# Altium PCB PCB1.PcbDoc (part 1 of 2)
Units mil, origin at the board's own origin, x right, y up, seen from the top; angles counter-clockwise.
Board outline 5020 x 3185 mil, 4 copper layers (Top Layer, GND, VCC, Bottom Layer), stack 23.756 mil thick; 166 components, 117 nets, 551 pads, 495 vias.
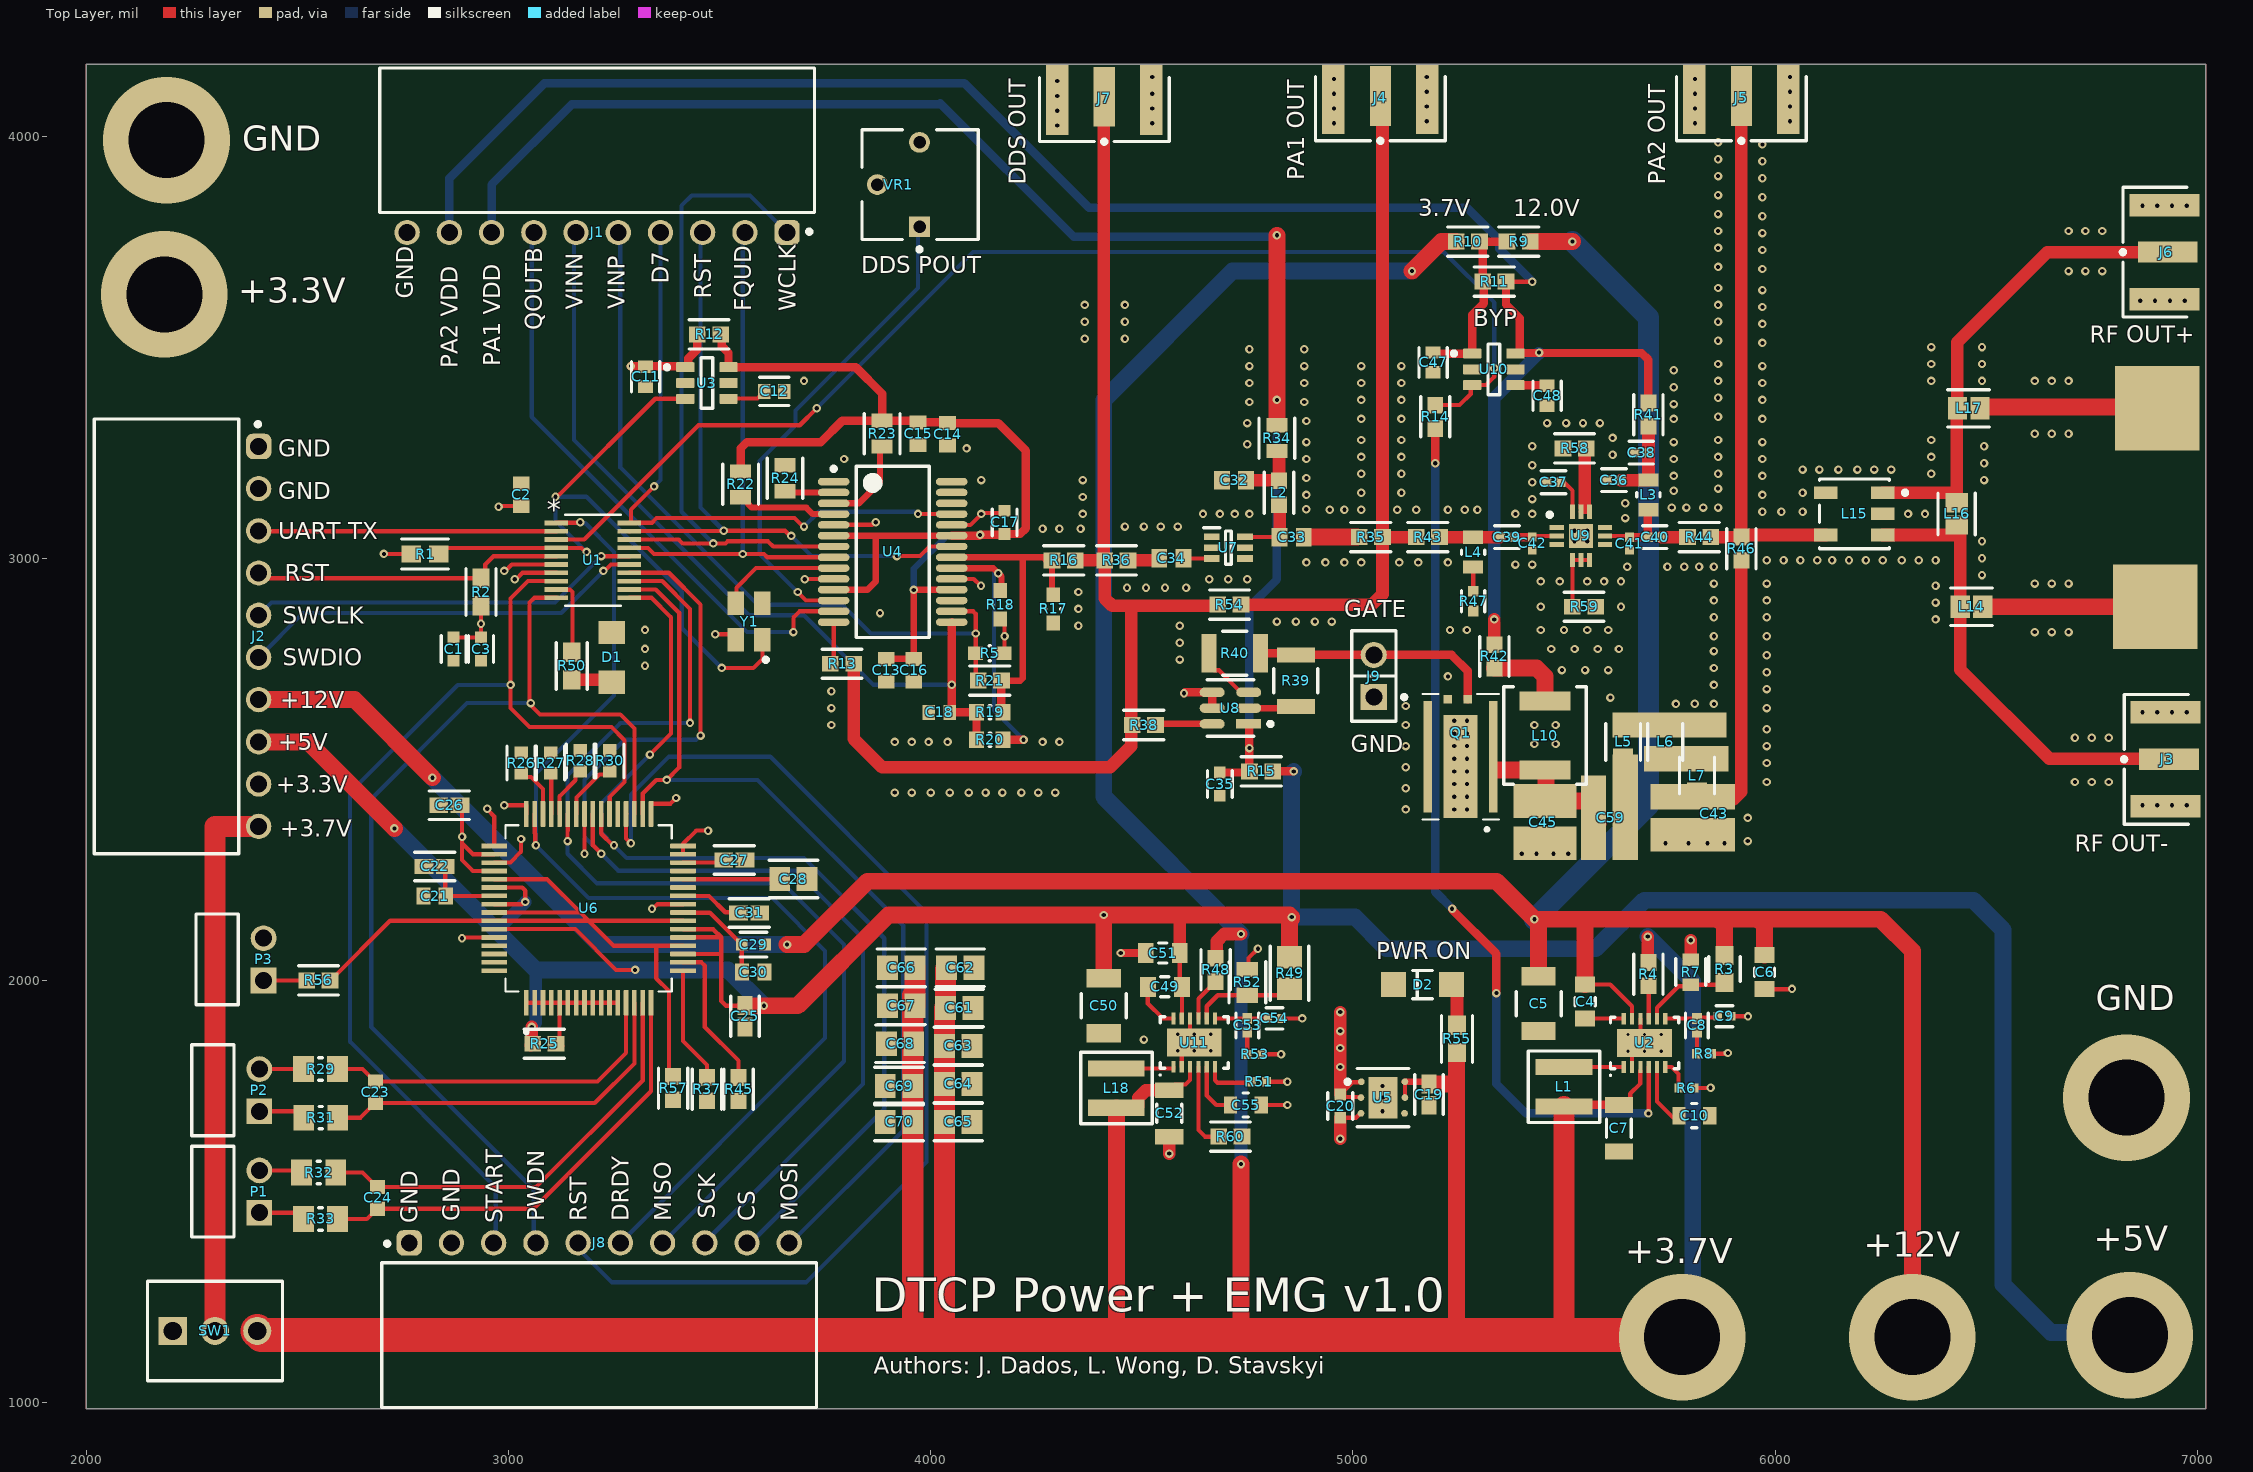
[diagram p0: Top Layer view]
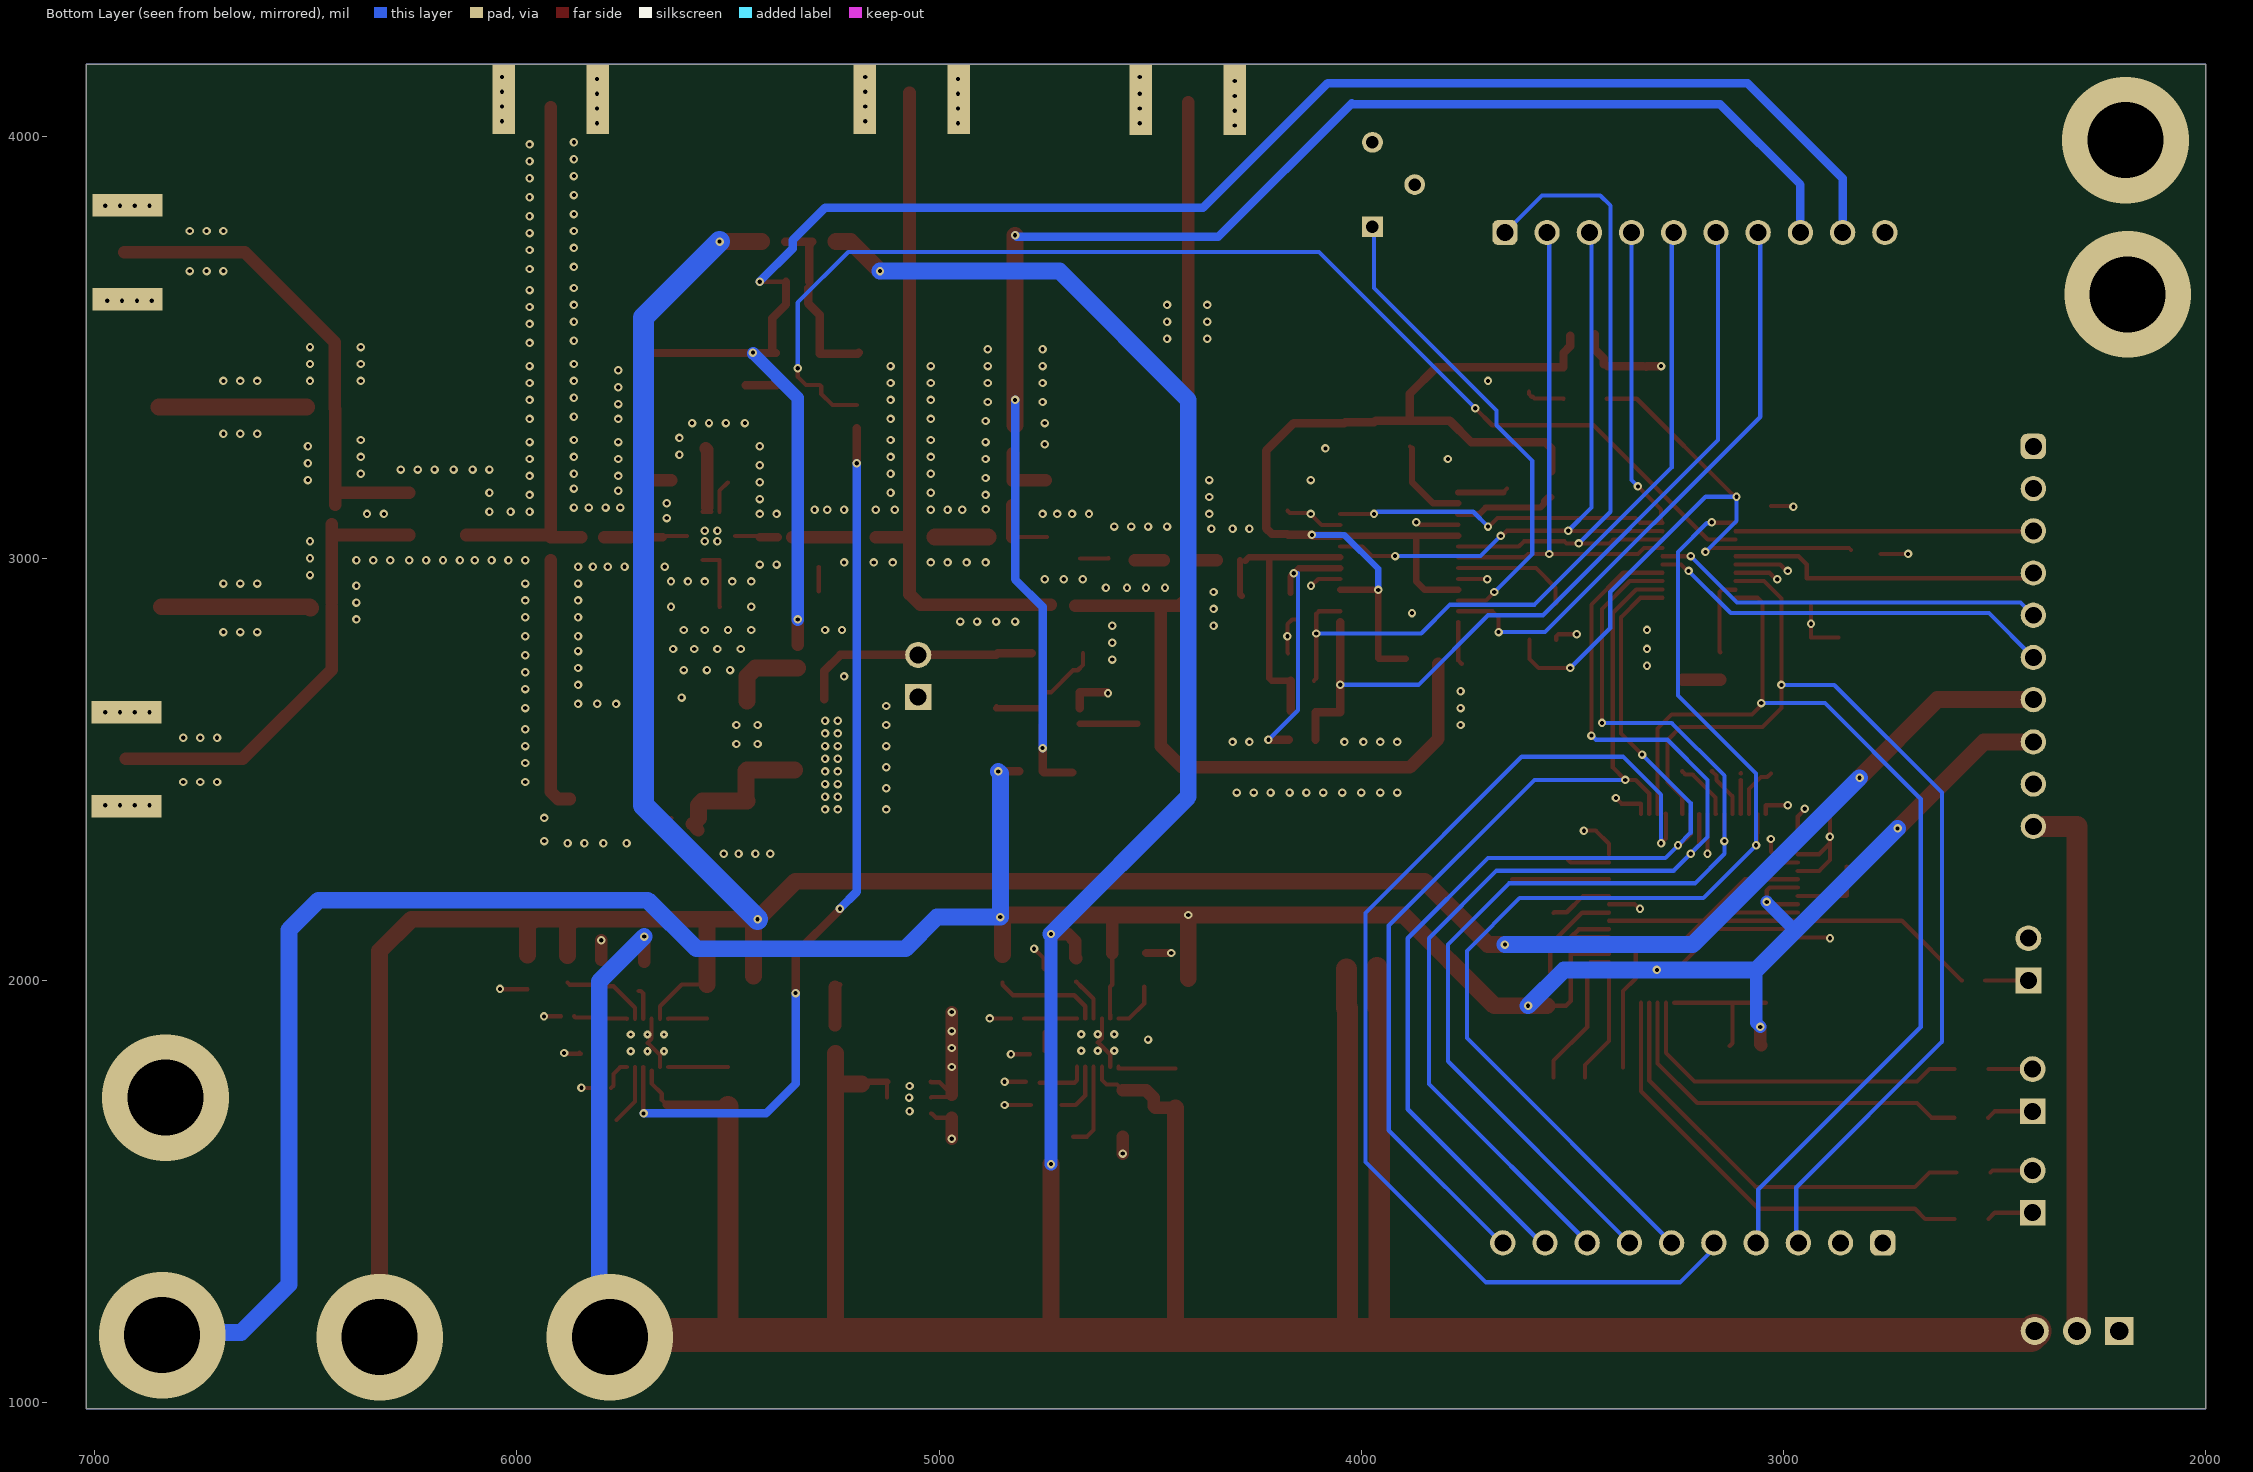
[diagram p1: Bottom Layer view, seen from below]

## Layer stack, top to bottom
Top Solder: solder mask 0.4, Solder Resist, Dk 3.5
Top Layer: signal copper 1.4
Dielectric 2: prepreg 2.8, PP-006, Dk 4.1
GND: signal copper 1.378
Dielectric 1: dielectric 12.6, FR-4, Dk 4.8
VCC: signal copper 1.378
Dielectric 3: prepreg 2.8, PP-006, Dk 4.1
Bottom Layer: signal copper 1.4
Bottom Solder: solder mask 0.4, Solder Resist, Dk 3.5

## Board outline
2000,985 2000,4170 7020,4170 7020,985

## Design rules (kind name [scope] priority, off if disabled: settings)
AssemblyTestPointUsage [All] p0: scope1count=1 scope1_0_kind=Board scope1_0_value=Board scope2count=1 scope2_0_kind=Board scope2_0_value=Board commentlength=0
AssemblyTestpoint [All] p0: scope1count=1 scope1_0_kind=Board scope1_0_value=Board scope2count=1 scope2_0_kind=Board scope2_0_value=Board commentlength=0
Clearance [All] p0: scope1count=1 scope1_0_kind=Board scope1_0_value=Board scope2count=1 scope2_0_kind=Board scope2_0_value=Board commentlength=0 gap=10
Clearance [All] p1: gap=10 ignorepadtopadclearanceinfootprint=FALSE except(0: Arc-Hole Track-Hole SMDPad-Hole THPad-Hole Via-Hole Fill-Hole Poly-Hole Region-Hole Text-Hole; 2: SMDPad-SMDPad; 5: Arc-Arc Arc-Track Arc-SMDPad Track-Track Track-SMDPad; 20: Arc-Fill Arc-Poly Arc-Region Track-Fill Track-Poly Track-Region Fill-Fill Fill-Poly Fill-Region Poly-Poly Poly-Region Region-Region)
ComponentClearance [All] p0: scope1count=1 scope1_0_kind=Board scope1_0_value=Board scope2count=1 scope2_0_kind=Board scope2_0_value=Board commentlength=0 gap=10 collisioncheckmode=3
DiffPairsRouting [All] p0: scope1count=1 scope1_0_kind=Board scope1_0_value=Board scope2count=1 scope2_0_kind=Board scope2_0_value=Board commentlength=0
FabricationTestPointUsage [All] p0: scope1count=1 scope1_0_kind=Board scope1_0_value=Board scope2count=1 scope2_0_kind=Board scope2_0_value=Board commentlength=0 valid=0 allowmultiple=FALSE
FabricationTestpoint [All] p0: scope1count=1 scope1_0_kind=Board scope1_0_value=Board scope2count=1 scope2_0_kind=Board scope2_0_value=Board commentlength=0 side=3 testpointundercomponent=TRUE minsize=40 maxsize=100 preferedsize=60 minholesize=0 maxholesize=40 preferedholesize=32 testpointgrid=1
FanoutControl Fanout_BGA [All] p0 off: scope1count=1 scope1_0_kind=Board scope1_0_value=Board scope2count=1 scope2_0_kind=Board scope2_0_value=Board commentlength=69 // Protel DXP Scope 1 Expression Was: IsBGA   Fanout_BGA (Default Rule)
FanoutControl Fanout_LCC [All] p0 off: scope1count=1 scope1_0_kind=Board scope1_0_value=Board scope2count=1 scope2_0_kind=Board scope2_0_value=Board commentlength=69 // Protel DXP Scope 1 Expression Was: IsLCC   Fanout_LCC (Default Rule)
FanoutControl Fanout_SOIC [All] p0 off: scope1count=1 scope1_0_kind=Board scope1_0_value=Board scope2count=1 scope2_0_kind=Board scope2_0_value=Board commentlength=71 // Protel DXP Scope 1 Expression Was: IsSOIC   Fanout_SOIC (Default Rule)
FanoutControl Fanout_Small [All] p0 off: scope1count=1 scope1_0_kind=Board scope1_0_value=Board scope2count=1 scope2_0_kind=Board scope2_0_value=Board commentlength=84 // Protel DXP Scope 1 Expression Was: (CompPinCount < 5)   Fanout_Small (Default Rule)
FanoutControl Fanout_Default [All] p0: scope1count=1 scope1_0_kind=Board scope1_0_value=Board scope2count=1 scope2_0_kind=Board scope2_0_value=Board commentlength=30 // Fanout_Default (Default Rule)
Height [All] p0: scope1count=1 scope1_0_kind=Board scope1_0_value=Board scope2count=1 scope2_0_kind=Board scope2_0_value=Board commentlength=0
HoleSize [All] p0: scope1count=1 scope1_0_kind=Board scope1_0_value=Board scope2count=1 scope2_0_kind=Board scope2_0_value=Board commentlength=0 absolutevalues=TRUE maxlimit=100 minlimit=1 maxpercent=80.000 minpercent=20.000
HoleToHoleClearance [All] p0: scope1count=1 scope1_0_kind=Board scope1_0_value=Board scope2count=1 scope2_0_kind=Board scope2_0_value=Board commentlength=0
LayerPairs [All] p0: scope1count=1 scope1_0_kind=Board scope1_0_value=Board scope2count=1 scope2_0_kind=Board scope2_0_value=Board commentlength=0 enforce=TRUE
MinimumSolderMaskSliver [All] p0: scope1count=1 scope1_0_kind=Board scope1_0_value=Board scope2count=1 scope2_0_kind=Board scope2_0_value=Board commentlength=0
NetAntennae [All] p0: scope1count=1 scope1_0_kind=Board scope1_0_value=Board scope2count=1 scope2_0_kind=Board scope2_0_value=Board commentlength=0
PasteMaskExpansion [All] p0: scope1count=1 scope1_0_kind=Board scope1_0_value=Board scope2count=1 scope2_0_kind=Board scope2_0_value=Board commentlength=0 expansion=0
PlaneClearance [All] p0: scope1count=1 scope1_0_kind=Board scope1_0_value=Board scope2count=1 scope2_0_kind=Board scope2_0_value=Board commentlength=0 clearance=40
PlaneClearance [All] p1: clearance=40
PlaneConnect [All] p0: scope1count=1 scope1_0_kind=Board scope1_0_value=Board scope2count=1 scope2_0_kind=Board scope2_0_value=Board commentlength=0 planeconnectstyle=Relief reliefexpansion=20 reliefentries=4 reliefconductorwidth=10 reliefairgap=10
PolygonConnect [All] p0: scope1count=1 scope1_0_kind=Board scope1_0_value=Board scope2count=1 scope2_0_kind=Board scope2_0_value=Board commentlength=0 connectstyle=Direct reliefconductorwidth=10 reliefentries=4 polygonreliefangle="90 Angle"
PolygonConnect [All] p1: connectstyle=Direct reliefconductorwidth=10 reliefentries=4 polygonreliefangle="90 Angle" airgapwidth=10
RoutingCorners [All] p0: scope1count=1 scope1_0_kind=Board scope1_0_value=Board scope2count=1 scope2_0_kind=Board scope2_0_value=Board commentlength=0 cornerstyle=45-Degree minsetback=100 maxsetback=100
RoutingLayers [All] p0: scope1count=1 scope1_0_kind=Board scope1_0_value=Board scope2count=1 scope2_0_kind=Board scope2_0_value=Board commentlength=0 top layer=Automatic mid layer 1=Automatic mid layer 2=Automatic bottom layer=Automatic
RoutingPriority [All] p0: scope1count=1 scope1_0_kind=Board scope1_0_value=Board scope2count=1 scope2_0_kind=Board scope2_0_value=Board commentlength=0
RoutingTopology [All] p0: scope1count=1 scope1_0_kind=Board scope1_0_value=Board scope2count=1 scope2_0_kind=Board scope2_0_value=Board commentlength=0 topology=Shortest
RoutingVias [All] p0: scope1count=1 scope1_0_kind=Board scope1_0_value=Board scope2count=1 scope2_0_kind=Board scope2_0_value=Board commentlength=0 holewidth=28 width=50 viastyle="Through Hole" minholewidth=28 minwidth=50 maxholewidth=28 maxwidth=50
RoutingVias [All] p1: holewidth=28 width=50 viastyle="Through Hole" minholewidth=28 minwidth=50 maxholewidth=28 maxwidth=50
ShortCircuit [All] p0: scope1count=1 scope1_0_kind=Board scope1_0_value=Board scope2count=1 scope2_0_kind=Board scope2_0_value=Board commentlength=0 allowed=FALSE
SilkToBoardRegionClearance [All] p0: scope1count=1 scope1_0_kind=Board scope1_0_value=Board scope2count=1 scope2_0_kind=Board scope2_0_value=Board commentlength=0
SilkToSilkClearance [All] p0: scope1count=1 scope1_0_kind=Board scope1_0_value=Board scope2count=1 scope2_0_kind=Board scope2_0_value=Board commentlength=0
SilkToSolderMaskClearance [All] p0 off: scope1count=1 scope1_0_kind=Board scope1_0_value=Board scope2count=1 scope2_0_kind=Board scope2_0_value=Board commentlength=44 // Protel DXP Scope 1 Expression Was: IsPad
SolderMaskExpansion [All] p0: scope1count=1 scope1_0_kind=Board scope1_0_value=Board scope2count=1 scope2_0_kind=Board scope2_0_value=Board commentlength=0 expansion=4
SolderMaskExpansion [All] p1: expansion=4 istentingtop=FALSE
UnRoutedNet [All] p0: scope1count=1 scope1_0_kind=Board scope1_0_value=Board scope2count=1 scope2_0_kind=Board scope2_0_value=Board commentlength=0
UnpouredPolygon [All] p0: scope1count=1 scope1_0_kind=Board scope1_0_value=Board scope2count=1 scope2_0_kind=Board scope2_0_value=Board commentlength=0
Width [All] p0: scope1count=1 scope1_0_kind=Board scope1_0_value=Board scope2count=1 scope2_0_kind=Board scope2_0_value=Board commentlength=0 maxlimit=80 minlimit=10 preferedwidth=10
Width [All] p1: maxlimit=80 minlimit=10 preferedwidth=10
29 further rules are at their usual default settings.

## Classes and differential pairs
component class "U_Boost 5V": C49 C50 C51 C52 C53 C54 C55 L18 R48 R49 R51 R52 R53 R60 U11
component class U_Switch2: C47 C48 U10
component class U_Switch1: C11 C12 U3
component class "U_PA stage 2": C36 C37 C38 C39 C40 C41 C42 C43 C45 C59 L3 L4 L5 L6 L7 L10 Q1 R41 R42 R43 R44 R46 R47 R58 R59 U9
component class "U_PA stage 1": C32 C33 C34 C35 L2 R34 R35 R36 R38 R39 R40 U7 U8
component class U_Output: L14 L15 L16 L17
component class U_LDO: C19 C20 U5
component class U_DDS: C13 C14 C15 C16 C17 C18 R5 R17 R18 R19 R20 R21 R22 R23 R24 U4 VR1 Y1
component class U_AFE: C21 C22 C23 C24 C25 C26 C27 C28 C29 C30 C31 R25 R26 R27 R28 R29 R30 R31 R32 R33 R37 R45 R56 R57 U6
component class U_MCU: C1 C2 C3 D1 R1 R2 R50 U1
component class System: C61 C62 C63 C64 C65 C66 C67 C68 C69 C70 D2 J1 J2 J3 J4 J5 J6 J7 J8 J9 P1 P2 P3 R9 R10 R11 R12 R13 R15 R16 R54 R55 SW1
component class "U_Boost 12V": C4 C5 C6 C7 C8 C9 C10 L1 R3 R4 R6 R7 R8 R14 U2

## Components (designator, comment, footprint, x,y, rotation, side; value= is the part's Value field where it differs from the comment)
C1 "C1608X5R1A106K080AC" FP-C1608-080-0_1-MFG 2870,2785 r90 top
C2 "VJ0603Y104KXJAP" CAPC1608X92X38NL15T08 3030,3150 r270 top
C3 "C1608X5R1A106K080AC" FP-C1608-080-0_1-MFG 2935,2785 r90 top
C4 "CGA3E2X7R1H104K080AE" FP-CGA3E-0_3-0_1-IPC_A 5550,1950 r270 top
C5 "GRM32ER61E226KE15L" FP-GRM32-MFG 5440,1945 r270 top
C6 "CGA3E1X7R1E105K080AC" FP-CGA3E-0_3-0_1-IPC_A 5975,2019.65 r270 top
C7 "CAP 10uF 10V 1206(3216)" CAPC1206(3216)190_L 5630,1650 r90 top
C8 "C1005X7R1H331K050BA" FP-C1005-050-0_05-IPC_B 5815,1893.6 r270 top
C9 "C0402C100J5GACTU" FP-C0402-BB-MFG 5880,1915 r0 top
C10 "C2012X5R1E475K125AB" FP-C2012-125-0_2-MFG 5808.58,1680 r0 top
C11 "C0603C106M8PACTU" FP-C0603C106M8PACTU-MFG 3325,3430 r90 top
C12 "C0603C101K4GAC7867" FP-C0603C-CF-MFG 3630,3395 r180 top
C13 "VJ0603Y104KXJAP" CAPC1608X92X38NL15T08 3895,2735 r90 top
C14 "VJ0603Y104KXJAP" CAPC1608X92X38NL15T08 4040,3293.43 r90 top
C15 "VJ0603Y104KXJAP" CAPC1608X92X38NL15T08 3970,3295 r90 top
C16 "VJ0603Y104KXJAP" CAPC1608X92X38NL15T08 3960,2735 r90 top
C17 "C1608X5R1A106K080AC" FP-C1608-080-0_1-MFG 4175,3085 r270 top
C18 "VJ0603D471KXXAJ" CAPC1608X92X38LL15T08 4020.39,2635 r180 top
C19 "C1608X5R1H105K080AB" FP-C1608-080-0_1-IPC_B 5180,1729.78 r270 top
C20 "C1608X5R1A106K080AC" FP-C1608-080-0_1-MFG 4970,1702.44 r90 top
C21 "VJ0603Y104KXJAP" CAPC1608X92X38NL15T08 2825,2200 r180 top
C22 "C1608X5R1H105K080AB" FP-C1608-080-0_1-IPC_B 2825,2270 r180 top
C23 "06035C472KAZ2A" CAPC1608X90X35LL15T15 2685,1735 r270 top
C24 "06035C472KAZ2A" CAPC1608X90X35LL15T15 2690,1485 r270 top
C25 "C1608X5R1H105K080AB" FP-C1608-080-0_1-IPC_B 3560,1915.22 r270 top
C26 "C1608X5R1H105K080AB" FP-C1608-080-0_1-IPC_B 2860,2415 r180 top
C27 "C1608X5R1H105K080AB" FP-C1608-080-0_1-IPC_B 3535.22,2285 r0 top
C28 "GRM21BR60J107ME15K" FP-GRM21B-0_2-e0_2_0_7-IPC_B 3675,2240 r0 top
C29 "C1608X5R1A106K080AC" FP-C1608-080-0_1-MFG 3580,2085 r180 top
C30 "VJ0603Y104KXJAP" CAPC1608X92X38NL15T08 3580,2020 r180 top
C31 "C1608X5R1H105K080AB" FP-C1608-080-0_1-IPC_B 3570,2160 r0 top
C32 "VJ0603Y183KXAAC" CAPC1608X92X38ML15T08 4718.54,3185 r180 top
C33 "VJ0603Y183KXAAC" CAPC1608X92X38ML15T08 4855,3050 r0 top
C34 "VJ0603Y183KXAAC" CAPC1608X92X38ML15T08 4570,3000 r0 top
C35 "C1608X5R1A106K080AC" FP-C1608-080-0_1-MFG 4685,2465 r270 top
C36 "GRM155R71H104KE14D" FP-GRM155-0_05-IPC_B 5618.13,3185 r0 top
C37 "GRM155R71H104KE14D" FP-GRM155-0_05-IPC_B 5475,3180 r0 top
C38 "GRM1555C1H102JA01D" FP-GRM155-0_05-IPC_B 5683.13,3250 r0 top
C39 "GRM1555C1H102JA01D" FP-GRM155-0_05-IPC_B 5365,3050 r0 top
C40 "GRM1555C1H102JA01D" FP-GRM155-0_05-IPC_B 5715,3050 r0 top
C41 "GRM1555C1HR40WA01D" CAPC1005X55X25LL05T10 5655,3034.65 r90 top
C42 "GRM1555C1HR40WA01D" CAPC1005X55X25LL05T10 5425,3035 r90 top
C43 "VJ0603D471KXXAJ" CAPC1608X92X38LL15T08 5855,2395 r90 top
C45 "VJ0603D471KXXAJ" CAPC1608X92X38LL15T08 5450,2375 r90 top
C47 "C0603C106M8PACTU" FP-C0603C106M8PACTU-MFG 5190,3463.62 r90 top
C48 "C0603C101K4GAC7867" FP-C0603C-CF-MFG 5460,3385 r90 top
C49 "CGA3E2X7R1H104K080AE" FP-CGA3E-0_3-0_1-IPC_A 4554.65,1985 r180 top
C50 "GRM32ER61E226KE15L" FP-GRM32-MFG 4410,1940 r270 top
C51 "CGA3E1X7R1E105K080AC" FP-CGA3E-0_3-0_1-IPC_A 4549.65,2065 r180 top
C52 "CAP 10uF 10V 1206(3216)" CAPC1206(3216)190_L 4565,1685 r90 top
C53 "C1005X7R1H331K050BA" FP-C1005-050-0_05-IPC_B 4750,1893.6 r270 top
C54 "C0402C100J5GACTU" FP-C0402-BB-MFG 4814.25,1910 r0 top
C55 "C2012X5R1E475K125AB" FP-C2012-125-0_2-MFG 4746.42,1705 r0 top
C59 "VJ0603D471KXXAJ" CAPC1608X92X38LL15T08 5609.61,2385 r180 top
C61 "GRM21BR60J107ME15K" FP-GRM21B-0_2-e0_2_0_7-IPC_B 4067.49,1935 r0 top
C62 "GRM21BR60J107ME15K" FP-GRM21B-0_2-e0_2_0_7-IPC_B 4070,2030 r0 top
C63 "GRM21BR60J107ME15K" FP-GRM21B-0_2-e0_2_0_7-IPC_B 4065,1845 r0 top
C64 "GRM21BR60J107ME15K" FP-GRM21B-0_2-e0_2_0_7-IPC_B 4065,1755 r0 top
C65 "GRM21BR60J107ME15K" FP-GRM21B-0_2-e0_2_0_7-IPC_B 4065,1665 r0 top
C66 "GRM21BR60J107ME15K" FP-GRM21B-0_2-e0_2_0_7-IPC_B 3930,2030 r180 top
C67 "GRM21BR60J107ME15K" FP-GRM21B-0_2-e0_2_0_7-IPC_B 3930,1940 r180 top
C68 "GRM21BR60J107ME15K" FP-GRM21B-0_2-e0_2_0_7-IPC_B 3927.49,1850 r180 top
C69 "GRM21BR60J107ME15K" FP-GRM21B-0_2-e0_2_0_7-IPC_B 3925,1750 r180 top
C70 "GRM21BR60J107ME15K" FP-GRM21B-0_2-e0_2_0_7-IPC_B 3925,1665 r180 top
D1 "150120SS75000" WL-SMCW_1206_150120xx75000 3245,2765 r270 top
D2 "HSMG-C150" FP-HSMG-C150-MFG 5165,1990 r0 top
J1 "613010143121" 613010143121 3210,3990 r180 top
J2 "613010143121" 613010143121 2190,2815 r270 top
J3 "SMA-J-P-H-ST-EM1" FP-SMA-J-P-H-ST-EM1-MFG 7195.08,2523.78 r90 top
J4 "SMA-J-P-H-ST-EM1" FP-SMA-J-P-H-ST-EM1-MFG 5065,4357.2 r180 top
J5 "SMA-J-P-H-ST-EM1" FP-SMA-J-P-H-ST-EM1-MFG 5920,4357.2 r180 top
J6 "SMA-J-P-H-ST-EM1" FP-SMA-J-P-H-ST-EM1-MFG 7192.2,3725 r90 top
J7 "SMA-J-P-H-ST-EM1" FP-SMA-J-P-H-ST-EM1-MFG 4411.22,4355.08 r180 top
J8 "613010143121" 613010143121 3215,1160 r0 top
J9 "TSW-102-14-G-S" FP-TSW-102-14-G-S-MFG 5049.49,2721.02 r90 top
L1 "XAL4030-472MEC" FP-XAL4030-472MEC-MFG 5500,1748.35 r90 top
L2 "LQM18NNR82K00D" FP-LQM18NN_00-IPC_B 4825,3155 r90 top
L3 "0805LS-152XJEC" FP-LQW21HN_00-MFG 5700,3150 r90 top
L4 "LQW21HN1R5J00L" FP-LQW21HN_00-MFG 5285,3014.57 r90 top
L5 "LQW2BHN68NJ03L" FP-LQW2BHN_03-MFG 5640,2565 r90 top
L6 "LQW2BHN68NJ03L" FP-LQW2BHN_03-MFG 5740,2565 r270 top
L7 "LQW2BHN68NJ03L" FP-LQW2BHN_03-MFG 5815,2485 r270 top
L10 "1812PS-333_R_" FP-1812PS-MFG 5455,2580 r90 top
L14 "MLZ2012M1R0HTD25" FP-MLZ2012-1_25-IPC_C 6465,2885 r0 top
L15 "MABAES0060" FP-MABAES0060-MFG 6187.52,3105 r0 top
L16 "MLZ2012M1R0HTD25" FP-MLZ2012-1_25-IPC_C 6430,3105 r270 top
L17 "MLZ2012M1R0HTD25" FP-MLZ2012-1_25-IPC_C 6458.39,3355 r180 top
L18 "XAL4030-472MEC" FP-XAL4030-472MEC-MFG 4440,1745 r90 top
P1 "TSW-102-08-G-S-RA" SMTC-TSW-102-08-X-S-RA 2410,1450 r90 top
P2 "TSW-102-08-G-S-RA" SMTC-TSW-102-08-X-S-RA 2410,1690 r90 top
P3 "TSW-102-08-G-S-RA" SMTC-TSW-102-08-X-S-RA 2420,2000 r90 top
Q1 "GS61008P" TRANS_GS61008P 5255,2530 r270 top
R1 "ESR03EZPF3301" FP-ESR03-IPC_A 2802.44,3010 r0 top
R2 "ESR03EZPF3301" FP-ESR03-IPC_A 2935,2920 r270 top
R3 "CRCW06031M02FKEA" FP-CRCW0603-e3-IPC_A 5880,2027.1 r90 top
R4 "RMCF0603ZG0R00" FP-RMCF0603-IPC_B 5700,2015 r270 top
R5 "SR0603FR-7T100RL" FP-SR0603-MFG 4140,2775 r0 top
R6 "ERJ-2RKF5762X" RESC1005X40X25NL05T05 5790,1745 r180 top
R7 "CRCW0603113KFKEC" FP-CRCW0603-e3-MFG 5800,2019.53 r270 top
R8 "CRCW040286K6FKED" RESC1005X40X25NL05T05 5831.26,1826.26 r180 top
R9 "RMCF0603ZG0R00" FP-RMCF0603-IPC_B 5392.6,3750 r0 top
R10 "RMCF0603ZG0R00" FP-RMCF0603-IPC_B 5272.4,3750 r180 top
R11 "RMCF0603ZG0R00" FP-RMCF0603-IPC_B 5335,3655 r180 top
R12 "RMCF0603ZG0R00" FP-RMCF0603-IPC_B 3475,3530 r180 top
R13 "RMCF0603ZG0R00" FP-RMCF0603-IPC_B 3790,2750 r0 top
R14 "RMCF0603ZG0R00" FP-RMCF0603-IPC_B 5195,3335 r270 top
R15 "RMCF0603ZG0R00" FP-RMCF0603-IPC_B 4782.6,2495 r0 top
R16 "RMCF0603ZG0R00" FP-RMCF0603-IPC_B 4315,2995 r180 top
R17 "SR0603FR-7T100RL" FP-SR0603-MFG 4290,2880 r270 top
R18 "SR0603FR-7T100RL" FP-SR0603-MFG 4165,2890 r270 top
R19 "100K" RESC0603(1608)_N 4140,2635 r180 top
R20 "100K" RESC0603(1608)_N 4140,2570 r180 top
R21 "RMCF0603ZG0R00" FP-RMCF0603-IPC_B 4140,2710 r0 top
R22 "ESR10EZPJ820" FP-ESR10-IPC_C 3550,3175 r90 top
R23 "ESR10EZPJ820" FP-ESR10-IPC_C 3885,3295 r90 top
R24 "ESR10EZPJ820" FP-ESR10-IPC_C 3655,3189.41 r90 top
R25 "RMCF0603ZG0R00" FP-RMCF0603-IPC_B 3085,1850 r180 top
R26 "CRGCQ0603J10K" FP-CRGCQ0603-IPC_C 3030,2515 r90 top
R27 "CRGCQ0603J10K" FP-CRGCQ0603-IPC_C 3100,2515 r90 top
R28 "CRGCQ0603J10K" FP-CRGCQ0603-IPC_C 3170,2520 r90 top
R29 "CRCW08055K00FKTA" RESC2013X50X30ML20T20 2555,1790 r0 top
R30 "CRGCQ0603J10K" FP-CRGCQ0603-IPC_C 3240,2520 r90 top
R31 "CRCW08055K00FKTA" RESC2013X50X30ML20T20 2555.35,1675 r0 top
R32 "CRCW08055K00FKTA" RESC2013X50X30ML20T20 2550.35,1545 r0 top
R33 "CRCW08055K00FKTA" RESC2013X50X30ML20T20 2555,1435 r0 top
R34 "ESR10EZPJ240" FP-ESR10-IPC_C 4820,3284.41 r90 top
R35 "RMCF0603ZG0R00" FP-RMCF0603-IPC_B 5042.4,3050 r180 top
R36 "RMCF0603ZG0R00" FP-RMCF0603-IPC_B 4440,2995 r180 top
R37 "RMCF0603ZG0R00" FP-RMCF0603-IPC_B 3470,1742.4 r90 top
R38 "RMCF0603ZG0R00" FP-RMCF0603-IPC_B 4505,2605 r180 top
R39 "ESR25JZPF2R00" FP-ESR25-MFG 4865,2710 r90 top
R40 "ESR25JZPF2R00" FP-ESR25-MFG 4720,2775 r0 top
R41 "RMCF0603ZG0R00" FP-RMCF0603-IPC_B 5700,3340 r90 top
R42 "RMCF0603ZG0R00" FP-RMCF0603-IPC_B 5335,2767.4 r90 top
R43 "RMCF0603ZG0R00" FP-RMCF0603-IPC_B 5177.4,3050 r180 top
R44 "RMCF0603ZG0R00" FP-RMCF0603-IPC_B 5820,3050 r180 top
R45 "RMCF0603ZG0R00" FP-RMCF0603-IPC_B 3545,1742.4 r270 top
R46 "RMCF0603ZG0R00" FP-RMCF0603-IPC_B 5920,3022.6 r90 top
R47 "FCHP0402E50R0BBT1" FP-FC0402-MFG 5285,2898.5 r90 top
R48 "RMCF0603ZG0R00" FP-RMCF0603-IPC_B 4675,2025 r270 top
R49 "TFCR0805-10W-E-4222BT-1K" FP-TFCR0805-IPC_A 4850,2017.45 r90 top
R50 "CRCW0603220RFKEAHP" FP-CRCW0603-HPe3-IPC_A 3150,2745 r90 top
R51 "ERJ-2RKF5762X" RESC1005X40X25NL05T05 4777.28,1760 r180 top
R52 "CRGP0805F10K" FP-CRGP0805-IPC_C 4750,1995.55 r270 top
R53 "CRCW040286K6FKED" RESC1005X40X25NL05T05 4767.28,1825 r180 top
R54 "RMCF0603ZG0R00" FP-RMCF0603-IPC_B 4707.6,2890 r180 top
R55 "CRCW0603220RFKEAHP" FP-CRCW0603-HPe3-IPC_A 5246.55,1861.62 r270 top
R56 "RMCF0603ZG0R00" FP-RMCF0603-IPC_B 2550,2000 r180 top
R57 "RMCF0603ZG0R00" FP-RMCF0603-IPC_B 3390,1745 r90 top
R58 "RMCF0603ZG0R00" FP-RMCF0603-IPC_B 5525,3260 r0 top
R59 "RMCF0603ZG0R00" FP-RMCF0603-IPC_B 5547.4,2885 r180 top
R60 "RMCF0603ZG0R00" FP-RMCF0603-IPC_B 4710,1630 r180 top
SW1 "TT11AGPC104" FP-TT11AGPC104-MFG 2305,1170 r0 top
U1 "MSPM0C1104SDGS20R" DGS0020A_TEX 3200,2995 r0 top
U2 "LTC3122EDE#PBF" LT-DE-UE-12_V 5690.79,1852.09 r90 top
U3 "TPS22810TDBVRQ1" FP-DBV0006A-MFG 3470,3415 r0 top
U4 "AD9850BRSZ-REEL" ADI-RS-28_N 3910,3015 r0 top
U5 "LD39200PU33R" FP-DFN6-7946637-MFG 5071.18,1722.6 r0 top
U6 "ADS1299-4PAG" QFP50P1200X1200X120-64N 3190,2170.79 r90 top
U7 "TQP369184" SOT65P210X110-6N 4705,3025 r0 top
U8 "UCC27511ADBVR" FP-DBV0006A-IPC_B 4710,2645 r180 top
U9 "PMA3-43-1W+" QFN51P300X300X89-13N 5539.92,3052.91 r0 top
U10 "TPS22810TDBVRQ1" FP-DBV0006A-MFG 5333.82,3447.4 r0 top
U11 "LTC3122EDE#PBF" LT-DE-UE-12_V 4624.21,1852.91 r90 top
VR1 "3362P-1-103LF" BOUR-3362P 3975,3885 r90 top
Y1 "830207044109" WE-SPXO_CFPS-39 3570,2850 r90 top

## Footprints (in the part's own frame and the unit in brackets; to place one, negate y for a bottom-side part, rotate by r counter-clockwise, add the part's x,y. Pads: shape width x height; smd on the part's side, far side on the other; paste and mask are expansions set on the pad)
613010143121 [mm] "Socket Header, Pitch 2.54 mm, THT, Angled, single row, 10p"
  rrect50% 1.52x1.52 hole 1.02: 1(-11.43,5.55)
  round 1.52 hole 1.02: 2(-8.89,5.55) 3(-6.35,5.55) 4(-3.81,5.55) 5(-1.27,5.55) 6(1.27,5.55) 7(3.81,5.55) 8(6.35,5.55) 9(8.89,5.55) 10(11.43,5.55)
  silkscreen extent -13.08,-4.35 13.08,5.62
ADI-RS-28_N [mm] "SOP, 28-Leads, Body 10.2x5.3mm, Pitch 0.65mm, IPC Medium Density"
  oval 1.9x0.45 smd: 1(-3.55,4.225) 2(-3.55,3.575) 3(-3.55,2.925) 4(-3.55,2.275) 5(-3.55,1.625) 6(-3.55,0.975) 7(-3.55,0.325) 8(-3.55,-0.325) 9(-3.55,-0.975) 10(-3.55,-1.625) 11(-3.55,-2.275) 12(-3.55,-2.925) 13(-3.55,-3.575) 14(-3.55,-4.225) 15(3.55,-4.225) 16(3.55,-3.575) 17(3.55,-2.925) 18(3.55,-2.275) 19(3.55,-1.625) 20(3.55,-0.975) 21(3.55,-0.325) 22(3.55,0.325) 23(3.55,0.975) 24(3.55,1.625) 25(3.55,2.275) 26(3.55,2.925) 27(3.55,3.575) 28(3.55,4.225)
  silkscreen extent -3.67,-5.15 2.2,5.15
BOUR-3362P [mm] "THD, 3-Leads, Body 6.6x6.99mm, Pitch 2.54mm"
  rect 1.25x1.25 hole 0.75: 1(-2.54,0.035)
  round 1.25 hole 0.75: 2(0,2.575) 3(2.54,0.035)
  silkscreen extent -4.02,-3.49 3.3,3.5
CAPC1005X55X25LL05T10 [mm] "Chip Capacitor, 2-Leads, Body 1.00x0.50mm, IPC High Density"
  rect 0.56x0.52 smd: 1(-0.39,0) 2(0.39,0)
CAPC1206(3216)190_L [mm] "Chip Capacitor, Body 3.2x1.6mm, Height 1.9mm, IPC High Density"
  rect 0.95x1.7 smd: 1(-1.4,0) 2(1.4,0)
  silkscreen extent -0.55,-0.75 0.55,0.75
CAPC1608X90X35LL15T15 [mm] "Chip Capacitor, 2-Leads, Body 1.60x0.81mm, IPC High Density"
  rect 0.85x0.9 smd: 1(-0.65,0) 2(0.65,0)
CAPC1608X92X38LL15T08 [mm] "Chip Capacitor, 2-Leads, Body 1.60x0.80mm, IPC High Density"
  rect 0.75x0.9 smd: 1(-0.625,0) 2(0.625,0)
CAPC1608X92X38ML15T08 [mm] "Chip Capacitor, 2-Leads, Body 1.60x0.80mm, IPC Low Density"
  rect 0.95x1.1 smd: 1(-0.725,0) 2(0.725,0)
CAPC1608X92X38NL15T08 [mm] "Chip Capacitor, 2-Leads, Body 1.60x0.80mm, IPC Medium Density"
  rect 0.85x1 smd: 1(-0.675,0) 2(0.675,0)
DGS0020A_TEX [mil]
  rect 56x11 smd paste+0 mask+0: 1(-86.5,88.58) 2(-86.5,68.9) 3(-86.5,49.21) 4(-86.5,29.53) 5(-86.5,9.84) 6(-86.5,-9.84) 7(-86.5,-29.53) 8(-86.5,-49.21) 9(-86.5,-68.9) 10(-86.5,-88.58) 11(86.5,-88.58) 12(86.5,-68.9) 13(86.5,-49.21) 14(86.5,-29.53) 15(86.5,-9.84) 16(86.5,9.84) 17(86.5,29.53) 18(86.5,49.21) 19(86.5,68.9) 20(86.5,88.58)
  silkscreen extent -66,-108 66,108
FP-1812PS-MFG [mm]
  rect 1.14x3.05 smd paste+0 mask+0: 1(-2.07,0) 2(2.07,0)
  silkscreen extent -2.94,-2.49 2.94,2.49
FP-C0402-BB-MFG [mm]
  rect 0.52x0.52 smd paste+0 mask+0: 1(-0.4,0) 2(0.4,0)
  silkscreen extent -0.5,-0.64 0.5,0.64
FP-C0603C106M8PACTU-MFG [mm]
  rect 0.75x0.9 smd paste+0 mask+0: 1(-0.6,0) 2(0.6,0)
  silkscreen extent -0.9,-0.85 0.9,0.85
FP-C0603C-CF-MFG [mm]
  rect 0.75x0.9 smd paste+0 mask+0: 1(-0.6,0) 2(0.6,0)
  silkscreen extent -0.87,-0.85 0.88,0.85
FP-C1005-050-0_05-IPC_B [mil]
  rect 25.17x22.54 smd paste+0 mask+0: 1(-16.4,0) 2(16.4,0)
  silkscreen extent -29,-27 29,27
FP-C1608-080-0_1-IPC_B [mil]
  rect 44.53x35.91 smd paste+0 mask+0: 1(-25.22,0) 2(25.22,0)
  silkscreen extent -47,-34 47,34
FP-C1608-080-0_1-MFG [mm]
  rect 0.7x0.7 smd paste+0 mask+0: 1(-0.7,0) 2(0.7,0)
  silkscreen extent -0.8,-0.75 0.8,0.75
FP-C2012-125-0_2-MFG [mm]
  rect 0.8x1.05 smd paste+0 mask+0: 1(-0.925,0) 2(0.925,0)
  silkscreen extent -0.15,-0.72 0.15,0.72
FP-CGA3E-0_3-0_1-IPC_A [mm]
  rect 0.956x1.206 smd paste+0 mask+0: 1(-1.025,0) 2(1.025,0)
  silkscreen extent -0.25,-0.6 0.25,0.6
FP-CRCW0603-e3-IPC_A [mil]
  rect 44.69x41.82 smd paste+0 mask+0: 1(-32.1,0) 2(32.1,0)
  silkscreen extent -30,-37 30,37
FP-CRCW0603-e3-MFG [mm]
  rect 0.75x1 smd paste+0 mask+0: 1(-0.75,0) 2(0.75,0)
  silkscreen extent -0.8,-0.9 0.8,0.9
FP-CRCW0603-HPe3-IPC_A [mil]
  rect 45.6x41.82 smd paste+0 mask+0: 1(-32.56,0) 2(32.56,0)
  silkscreen extent -55,-37 55,37
FP-CRGCQ0603-IPC_C [mil]
  rect 29.85x31.97 smd paste+0 mask+0: 1(-24.68,0) 2(24.68,0)
  silkscreen extent -40,-33 40,33
FP-CRGP0805-IPC_C [mil]
  rect 35.67x51.57 smd paste+0 mask+0: 1(-30.55,0) 2(30.55,0)
  silkscreen extent -48,-43 48,43
FP-DBV0006A-IPC_B [mm]
  rect 1.505x0.57 smd paste+0 mask+0: 1(-1.1,0.95)
  rrect100% 1.505x0.57 smd paste+0 mask+0: 2(-1.1,0) 3(-1.1,-0.95) 4(1.1,-0.95) 5(1.1,0) 6(1.1,0.95)
  silkscreen extent -2.53,-1.7 1.4,1.7
FP-DBV0006A-MFG [mm]
  rrect17% 1.1x0.6 smd paste+0 mask+0: 1(-1.3,0.95) 2(-1.3,0) 3(-1.3,-0.95) 4(1.3,-0.95) 5(1.3,0) 6(1.3,0.95)
  silkscreen extent -2.52,-1.53 0.35,1.53
FP-DFN6-7946637-MFG [mm]
  round 0.405 smd paste+0 mask+0: 1(-1.3,0.95) 2(-1.321,0) 3(-1.321,-0.95) 4(1.3,-0.95) 5(1.321,0) 6(1.321,0.95)
  rect 1.75x2.5 smd paste+0 mask+0: 7(0,0)
  silkscreen extent -2.25,-1.75 1.55,1.75
FP-ESR03-IPC_A [mil]
  rect 45.6x39.85 smd paste+0 mask+0: 1(-32.56,0) 2(32.56,0)
  silkscreen extent -55,-36 55,36
FP-ESR10-IPC_C [mil]
  rect 33.79x49.69 smd paste+0 mask+0: 1(-30.59,0) 2(30.59,0)
  silkscreen extent -47,-42 47,42
FP-ESR25-MFG [mm]
  rect 0.9x2.3 smd paste+0 mask+0: 1(-1.55,0) 2(1.55,0)
  silkscreen extent -0.72,-1.33 0.72,1.33
FP-FC0402-MFG [mm]
  rect 0.635x0.61 smd paste+0 mask+0: 1(-0.597,0) 2(0.597,0)
  silkscreen extent -0.64,-0.7 0.64,0.7
FP-GRM21B-0_2-e0_2_0_7-IPC_B [mil]
  rect 49.4x57.33 smd paste+0 mask+0: 1(-32.51,0) 2(32.51,0)
  silkscreen extent -57,-44 57,44
FP-GRM32-MFG [mm]
  rect 1.1x2.05 smd paste+0 mask+0: 1(-1.65,0) 2(1.65,0)
  silkscreen extent -0.72,-1.35 0.72,1.35
FP-GRM155-0_05-IPC_B [mil]
  rect 24.23x22.54 smd paste+0 mask+0: 1(-16.87,0) 2(16.87,0)
  silkscreen extent -29,-27 29,27
FP-HSMG-C150-MFG [mm]
  rect 1.5x1.5 smd paste+0 mask+0: 1(-1.75,0) 2(1.75,0)
  silkscreen extent -0.6,-0.85 0.6,0.85
FP-LQM18NN_00-IPC_B [mil]
  rect 39.63x37.73 smd paste+0 mask+0: 1(-28.58,0) 2(28.58,0)
  silkscreen extent -48,-35 48,35
FP-LQW2BHN_03-MFG [mm]
  rect 1.1x1.2 smd paste+0 mask+0: 1(-0.95,0) 2(0.95,0)
  silkscreen extent -1.1,-1.05 1.1,1.05
FP-LQW21HN_00-MFG [mm]
  rect 0.8x1.2 smd paste+0 mask+0: 1(-0.9,0) 2(0.9,0)
  silkscreen extent -0.13,-0.7 0.13,0.7
FP-MABAES0060-MFG [mm]
  rect 1.4x0.76 smd paste+0 mask+0: 1(1.715,1.27) 2(1.715,0) 3(1.715,-1.27) 4(-1.715,-1.27) 5(-1.715,1.27)
  silkscreen extent -2.09,-2.09 3.18,2.09
FP-MLZ2012-1_25-IPC_C [mil]
  rect 45.45x53.39 smd paste+0 mask+0: 1(-26.61,0) 2(26.61,0)
  silkscreen extent -49,-44 49,44
FP-RMCF0603-IPC_B [mil]
  rect 39.61x37.73 smd paste+0 mask+0: 1(-27.6,0) 2(27.6,0)
  silkscreen extent -47,-35 47,35
FP-SMA-J-P-H-ST-EM1-MFG [mm]
  rect 1.27x3.6 smd paste+0 mask+0: 1(0,6.66)
  rect 1.35x4.2 smd paste+0 mask+0: 2(-2.825,6.86) 3(2.825,6.86)
  rect 1.35x4.2 smd far side paste+0 mask+0: 4(-2.825,6.86) 5(2.825,6.86)
  silkscreen extent -3.9,5.5 3.9,9.48
FP-SR0603-MFG [mm]
  rect 0.9x0.8 smd paste+0 mask+0: 1(-0.85,0) 2(0.85,0)
  silkscreen extent -0.03,-0.45 0.03,0.45
FP-TFCR0805-IPC_A [mil]
  rect 53.38x59.38 smd paste+0 mask+0: 1(-37.45,0) 2(37.45,0)
  silkscreen extent -64,-45 64,45
FP-TSW-102-14-G-S-MFG [mm]
  rect 1.57x1.57 hole 1.02 paste-1000 mask+0: 1(-1.27,0)
  round 1.57 hole 1.02 paste-1000 mask+0: 2(1.27,0)
  silkscreen extent -2.73,-1.95 2.73,1.34
FP-TT11AGPC104-MFG [mm]
  rect 1.69x1.69 hole 1.09 paste+0 mask+0: 1(-2.54,0)
  round 1.69 hole 1.09 paste+0 mask+0: 2(0,0) 3(2.54,0)
  silkscreen extent -4.07,-3 4.07,3
FP-XAL4030-472MEC-MFG [mm]
  rect 0.98x3.4 smd paste+0 mask+0: 1(-1.185,0) 2(1.185,0)
  silkscreen extent -2.15,-2.15 2.15,2.15
LT-DE-UE-12_V [mm] "SON, 12-Leads, Body 4x3mm, Pitch 0.5mm, Thermal Pad 3.3x1.7mm"
  rect 0.7x0.25 smd: 1(-1.45,1.25) 2(-1.45,0.75) 3(-1.45,0.25) 4(-1.45,-0.25) 5(-1.45,-0.75) 6(-1.45,-1.25) 7(1.45,-1.25) 8(1.45,-0.75) 9(1.45,-0.25) 10(1.45,0.25) 11(1.45,0.75) 12(1.45,1.25)
  rect 1.7x3.3 smd: 13(0,0)
  silkscreen extent -2,-2.05 1.55,2.1
QFN51P300X300X89-13N [mm]
  rect 0.85x0.3 smd: 1(-1.45,0.51) 2(-1.45,0) 3(-1.45,-0.51) 7(1.45,-0.51) 8(1.45,0) 9(1.45,0.51)
  rect 0.3x0.85 smd: 4(-0.51,-1.45) 5(0,-1.45) 6(0.51,-1.45) 10(0.51,1.45) 11(0,1.45) 12(-0.51,1.45)
  rect 1.45x1.45 smd: 13(0,0)
  silkscreen extent -2,1.15 -1.75,1.4
QFP50P1200X1200X120-64N [mm]
  rrect25% 1.56x0.28 smd: 1(-5.68,3.75) 2(-5.68,3.25) 3(-5.68,2.75) 4(-5.68,2.25) 5(-5.68,1.75) 6(-5.68,1.25) 7(-5.68,0.75) 8(-5.68,0.25) 9(-5.68,-0.25) 10(-5.68,-0.75) 11(-5.68,-1.25) 12(-5.68,-1.75) 13(-5.68,-2.25) 14(-5.68,-2.75) 15(-5.68,-3.25) 16(-5.68,-3.75) 33(5.68,-3.75) 34(5.68,-3.25) 35(5.68,-2.75) 36(5.68,-2.25) 37(5.68,-1.75) 38(5.68,-1.25) 39(5.68,-0.75) 40(5.68,-0.25) 41(5.68,0.25) 42(5.68,0.75) 43(5.68,1.25) 44(5.68,1.75) 45(5.68,2.25) 46(5.68,2.75) 47(5.68,3.25) 48(5.68,3.75)
  rrect25% 0.28x1.56 smd: 17(-3.75,-5.68) 18(-3.25,-5.68) 19(-2.75,-5.68) 20(-2.25,-5.68) 21(-1.75,-5.68) 22(-1.25,-5.68) 23(-0.75,-5.68) 24(-0.25,-5.68) 25(0.25,-5.68) 26(0.75,-5.68) 27(1.25,-5.68) 28(1.75,-5.68) 29(2.25,-5.68) 30(2.75,-5.68) 31(3.25,-5.68) 32(3.75,-5.68) 49(3.75,5.68) 50(3.25,5.68) 51(2.75,5.68) 52(2.25,5.68) 53(1.75,5.68) 54(1.25,5.68) 55(0.75,5.68) 56(0.25,5.68) 57(-0.25,5.68) 58(-0.75,5.68) 59(-1.25,5.68) 60(-1.75,5.68) 61(-2.25,5.68) 62(-2.75,5.68) 63(-3.25,5.68) 64(-3.75,5.68)
  silkscreen extent -7.54,-5 5,5
RESC0603(1608)_N [mm] "Chip Resistor, Body 1.6x0.8mm, IPC Medium Density"
  rect 0.9x1 smd: 1(-0.8,0) 2(0.8,0)
  silkscreen extent -0.05,-0.4 0.05,0.4
RESC1005X40X25NL05T05 [mm] "Chip Resistor, 2-Leads, Body 1.00x0.50mm, IPC Medium Density"
  rect 0.55x0.55 smd: 1(-0.45,0) 2(0.45,0)
RESC2013X50X30ML20T20 [mm] "Chip Resistor, 2-Leads, Body 2.00x1.25mm, IPC Low Density"
  rect 1.25x1.55 smd: 1(-1.025,0) 2(1.025,0)
  silkscreen extent -0.1,-0.67 0.1,0.67
SMTC-TSW-102-08-X-S-RA [mm] ".025 SQ Post Terminal Strip Assembly, 1x2 Pins, Right Angle, 2.54mm Pitch, Male"
  rect 1.55x1.55 hole 1.02: 1(0,0)
  round 1.55 hole 1.02: 2(2.54,0)
  silkscreen extent -1.46,1.52 4,4.06
SOT65P210X110-6N [mm]
  rect 0.95x0.4 smd: 1(-1,0.65) 2(-1,0) 3(-1,-0.65) 4(1,-0.65) 5(1,0) 6(1,0.65)
  silkscreen extent -1.48,-1 0.18,1.2
TRANS_GS61008P [mm]
  rect 6.7x0.5 smd: 1(0,1.97) 4(0,-1.97)
  rect 0.5x0.5 smd: 2(-3.45,0.43) 3(-3.45,-0.77)
  rect 6.2x2.04 smd paste-4: 5(0.6,0)
  silkscreen extent -3.77,-2.29 4.47,2.29
WE-SPXO_CFPS-39 [mm] "Simple Packaged Quartz Oscillator, body 3.2x2.5mm"
  rect 1.4x1 smd: 1(-1.1,-0.8) 2(1.1,-0.8) 3(1.1,0.8) 4(-1.1,0.8)
  silkscreen extent -2.42,-1.13 -2.18,-0.88
WL-SMCW_1206_150120xx75000 [mm] "SMD Mono-color Chip LED, body 3.2x1.6mm"
  rect 1.4x1.6 smd: 1(-1.5,0) 2(1.5,0)

## Part data
C1 C3 C17 C20 C29 C35: library part CMP-2000-04979-3, "Multilayer Ceramic Capacitors 10µF ±10% 10V X5R SMD 0603"
C2 C13 C14 C15 C16 C21 C30: library part CMP-2006-01211-1
C4 C49: library part CMP-08246-002410-1, "Cap Ceramic 100nF 50V X7R 10% Pad SMD 0603 +125°C Automotive T/R"
C5 C50: library part CMP-2000-05458-2, "CAP CER 22UF 25V X5R 1210"
C6 C51: library part CMP-08246-001507-1, "Cap Ceramic 1uF 25V X7R 10% Pad SMD 0603 +125°C Automotive T/R"
C7 C52: library part CMP-1037-04967-1, "CAP 10uF 10V ±10% 1206 (3216 Metric) Thickness 1.9mm SMD"
C8 C53: library part CMP-08246-002681-1, "Multilayer Ceramic Capacitors 330pF ±10% 50V X7R SMD 0402"
C9 C54: library part CMP-2008-03404-2, "Multilayer Ceramic Capacitor, C Series, 10 Pf, - 5%, C0G / Np0, 50 V, 0402 [1005 Metric] Rohs Compliant: Yes"
C10 C55: library part CMP-08246-004908-1, "Multilayer Ceramic Capacitors 4.7µF ±10% 25V X5R SMD 0805"
C11 C47: library part CMP-03020-034654-1, "CAP CER 10UF 10V X5R 0603"
C12 C48: library part CMP-03020-014723-2, "CAP CER 100PF 16V NP0 0603"
C18 C43 C45 C59: library part CMP-2006-01521-1
C19 C22 C25 C26 C27 C31: library part CMP-2000-06025-2, "Multilayer Ceramic Capacitors 1µF ±10% 50V X5R SMD 0603"
C23 C24: library part CMP-2006-04440-1
C28 C61 C62 C63 C64 C65 C66 C67 C68 C69 C70: library part CMP-06035-052658-1, "Chip Multilayer Ceramic Capacitors for General Purpose, 0805, 100uF, X5R, 15%, 20%, 6.3V"
C32 C33 C34: library part CMP-2006-01326-1
C36 C37: library part CMP-2008-04639-2, "Chip Multilayer Ceramic Capacitors for General Purpose, 0402, 0.10uF, X7R, 15%, 10%, 50V"
C38 C39 C40: library part CMP-2008-04254-2, "Chip Multilayer Ceramic Capacitors for General Purpose, 0402, 1000pF, C0G, 30ppm/°C, 5%, 50V"
C41 C42: library part CMP-1034-00010-2
D1: library part CMP-1426-00017-3, "Led, Red, 630 Nm, 1.9 V, 30 Ma, 60 Mcd Rohs Compliant: Yes"
D2: library part CMP-2000-05061-2, "LED GREEN DIFFUSED 1206 SMD"
J1 J2 J8: library part CMP-1502-01419-3
J3 J4 J5 J6 J7: library part CMP-02754-000006-1, "CONN SMA JACK STR 50OHM EDGE MNT"
J9: library part CMP-02766-001740-1, "CONN HEADER VERT 2POS 2.54MM"
L1 L18: library part CMP-11268-000082-1, "Power Inductor (SMD), 4.7 µH, 5.1 A, Shielded, 4.5 A, XAL40xx Series, 4mm x 4mm x 3.1mm"
L2: library part CMP-06042-016197-1, "Multilayer Type Inductor for General Circuits, 0603 (1608), 820nH, 10%, 2.1?, 35mA"
L3: library part CMP-06042-001639-1, "0805LS-152XJEC Coilcraft"
L4: library part CMP-06042-001639-1, "Wire Wound Ferrite type RF Inuctor 1.5uH ±5% 85mA 5.33? 0805 (2012)"
L5 L6 L7: library part CMP-06042-008671-1, "Wire Wound RF Inductor 68nH ±5% 460mA 0.23? 0805 (2015)"
L10: library part CMP-11268-000188-1, "1812PS-333_R_ Coilcraft"
L14 L16 L17: library part CMP-08253-000383-1, "Shielded Multilayer Inductor 1uH ±20% 800mA 130m? AEC-Q200 SMD 0805"
L15: library part CMP-97513-000003-1, "BALUN 300KHZ-200MHZ 1:1 6SMD"
P1 P2 P3: library part CMP-1024-00320-1, "0.025\" SQ Post Header, Through-hole, Right Angle, -55 to 125 degC, 2.54 mm Pitch, 2-Pin, Male, RoHS"
Q1: "Top cooled 100V enhancement mode GaN transistor"
R1 R2: library part CMP-08839-028747-1, "3.3k? ±1% 0.25W 0603 Anti-Surge Chip Resistor AEC-Q200"
R3: library part CMP-2000-03018-2, "RES Thick Film, 1.02M?, 1%, 0.1W, 100ppm/°C, 0603"
R4 R9 R10 R11 R12 R13 R14 R15 R16 R21 R25 R35 R36 R37 R38 R41 R42 R43 R44 R45 R46 R48 R54 R56 R57 R58 R59 R60: library part CMP-26527-006412-1, "0? ±0 0.1W 0603 Thick Film Chip Resistor AEC-Q200 compliant"
R5 R17 R18: library part CMP-03412-002710-1, "RES SMD 0603 1/4W 1% 100 OHM"
R6 R51: library part CMP-2002-01001-1
R7: library part CMP-02407-003381-1, "RES Thick Film, 113k?, 1%, 0.1W, 100ppm/°C, 0603"
R8 R53: library part CMP-2002-00247-1
R19 R20: library part CMP-1012-00736-1, "100K 0.1W 1% 0603 (1608 Metric)  SMD"
R22 R23 R24: library part CMP-08839-027843-1, "82? ±5% 0.4W 0805 Anti-Surge Chip Resistor AEC-Q200"
R26 R27 R28 R30: library part CMP-03211-009884-1, "CRGCQ 0603 10K 5%"
R29 R31 R32 R33: library part CMP-2001-04239-1
R34: library part CMP-08839-028611-1, "24? ±5% 0.4W 0805 Anti-Surge Chip Resistor AEC-Q200"
R39 R40: library part CMP-08839-008954-1, "2? ±1% 0.66W 1210 Anti-Surge Chip Resistor AEC-Q200"
R47: library part CMP-05494-120702529-1, "FCHP0402E50R0BBT1 SMD Chip Resistor, 50 Ohm, ± 0.1%, 1 W, 0402 [1005 Metric], Thin Film, High Frequency"
R49: library part CMP-250906-237835-1, "RES Thin Film,  42.2k?, 0.1%, 0.1W, 25ppm/°C, 0805"
R50 R55: library part CMP-02407-003593-1, "RES Thick Film, 220?, 1%, 0.33W, 100ppm/°C, 0603"
R52: library part CMP-03211-006861-1, "CRGP 0805 10K 1%"
SW1: library part CMP-03408-000020-1, "SWITCH TOGGLE SPST 0.4VA 20V"
U1: "24MHz Arm® Cortex®-M0+ MCU with 16KB flash, 1KB SRAM, 12-bit ADC 20-VSSOP -40 to 125"
U2 U11: library part CMP-0492-00369-1, "2.5 A Synchronous Step-Up DC/DC Converter with Output Disconnect, 12-pin SON (DE-UE-12), -40 to 125 degC, Pb-Free"
U3 U10: library part CMP-04910-000007-2, "IC PWR SWITCH N-CHAN 1:1 SOT23-6"
U4: library part CMP-0293-00041-1, "CMOS, 125 MHz Complete DDS Synthesizer, 10-Bit, Parallel, Serial, RS-28, 1500 Reel, Pb-Free"
U5: library part CMP-12153-000011-1, "IC REG LINEAR 3.3V 2A 6DFN"
U6: "Low-Noise, 4-Channel, 24-Bit Analog-to-Digital Converter for Biopotential Measurements"
U7: "DC  6 GHz Gain Block"
U8: library part CMP-04912-000035-1, "IC GATE DRVR LOW-SIDE SOT23-6"
U9: "Integrated Circuit"
VR1: library part CMP-1747-00004-1, "Square Trimpot(R) Trimming Potentiometer, 10 KOhm, 300 V, -55 to 125 degC, 3-Pin THD, RoHS, Tube"
Y1: library part CMP-03913-116855802-1, "830207044109 WE-SPXO Crystal Oscillator"

## Free pads (board coordinates)
  rect 150x80 smd paste+0 mask+0: 2(5455,2325) 2(5455,2425)
  rect 60x200 smd paste+0 mask+0: 2(5570,2385)
  rect 60x250 smd paste+0 mask+0: 2(5645,2410)
  rect 270x60 smd paste+0 mask+0: 2(5750,2605)
  rect 200x60 smd paste+0 mask+0: 2(5790,2525) 2(5805,2435)
  rect 200x80 smd paste+0 mask+0: 2(5805,2345)
  rect 200x200 smd paste+0 mask+0: 2(6900,2885) 2(6905,3355)

## Via types
v1: diameter 20, hole 10, Top Layer to Bottom Layer, tented both sides, 477 vias
v2: diameter 19.68, hole 7.87, Top Layer to Bottom Layer, 12 vias
v3: diameter 300, hole 180, Top Layer to Bottom Layer, 6 vias

## Nets (pads, with @x,y where several pads share a name; then routed paths per layer and width w, separated by ;. In a path a pad name is that pad's centre, name@x,y a point inside that pad or via, vN(x,y) a via of type N, cw(c..) or ccw(c..) an arc to the next point about the centre after c; other vN are vias at no path point)
3V3: C1.2 C2.2 C3.2 C11.2 C20.2 C26.1 J2.9 R1.1 R2.2 R12.2 U1.6 U3.1 U5.1 U5.2 U6.48 U6.50 U6.52 Y1.4 | length 1349.2
  Top Layer w10: v1@2705,3010 R1.1@2769.88,3010 ; C1.2@2870,2812.56 C3.2@2935,2812.56 R2.2@2935,2887.44 ; C26.1@2890.68,2415.08 2890,2414.4 2890,2325 ; U6.52@2966.38,2259.37 2915.63,2259.37 2890,2285 2890,2325 ; U6.50@2966.38,2298.74 2916.26,2298.74 2890,2325 ; v1@2975,3120 2978.43,3123.43 C2.2@3030,3123.43 ; v1(2990,2970) 2992.71,2970 3007.86,2985.16 U1.6@3113.5,2985.16 ; v1@2990.09,2415 3041.85,2415 3042.36,2414.49 U6.48@3042.36,2394.41 ; U3.1@3416.83,3454.39 U3.1@3418.82,3452.4 3418.94,3452.4 U3.1@3425.75,3459.21 ; v1(3490,2820) 3533.07,2820 3538.5,2814.57 Y1.4@3538.5,2806.69 ; U5.2@5019.16,1722.6 5018.02,1723.74 4976.26,1723.74 C20.2@4970,1730 4998.86,1758.86 5018.86,1758.86 U5.1@5020,1760
  Top Layer w20: v1(3290,3455.17) 3323.46,3455.17 C11.2@3325,3453.62 ; C11.2@3331.99,3454.39 U3.1@3416.83,3454.39 ; U3.1@3425.75,3459.21 3425.75,3473.35 3447.4,3495 R12.2@3447.4,3530
  Top Layer w30: C20.2@4970,1730 v1(4970,1925)
  other v1: 4970,1795 4970,1840 4970,1880 2890.18,2340.18 2990.09,2415.09 2935,2845 2705.09,3010.09 2976.71,3121.71
  other v3: 2185,3625